# Altium PCB 24V_to_5V_Buck_Converter.PcbDoc
Units mm, origin at the board's own origin, x right, y up, seen from the top; angles counter-clockwise.
Board outline 41 x 20 mm, 2 copper layers (Top Layer, Bottom Layer); 14 components, 7 nets, 36 pads, 8 vias.
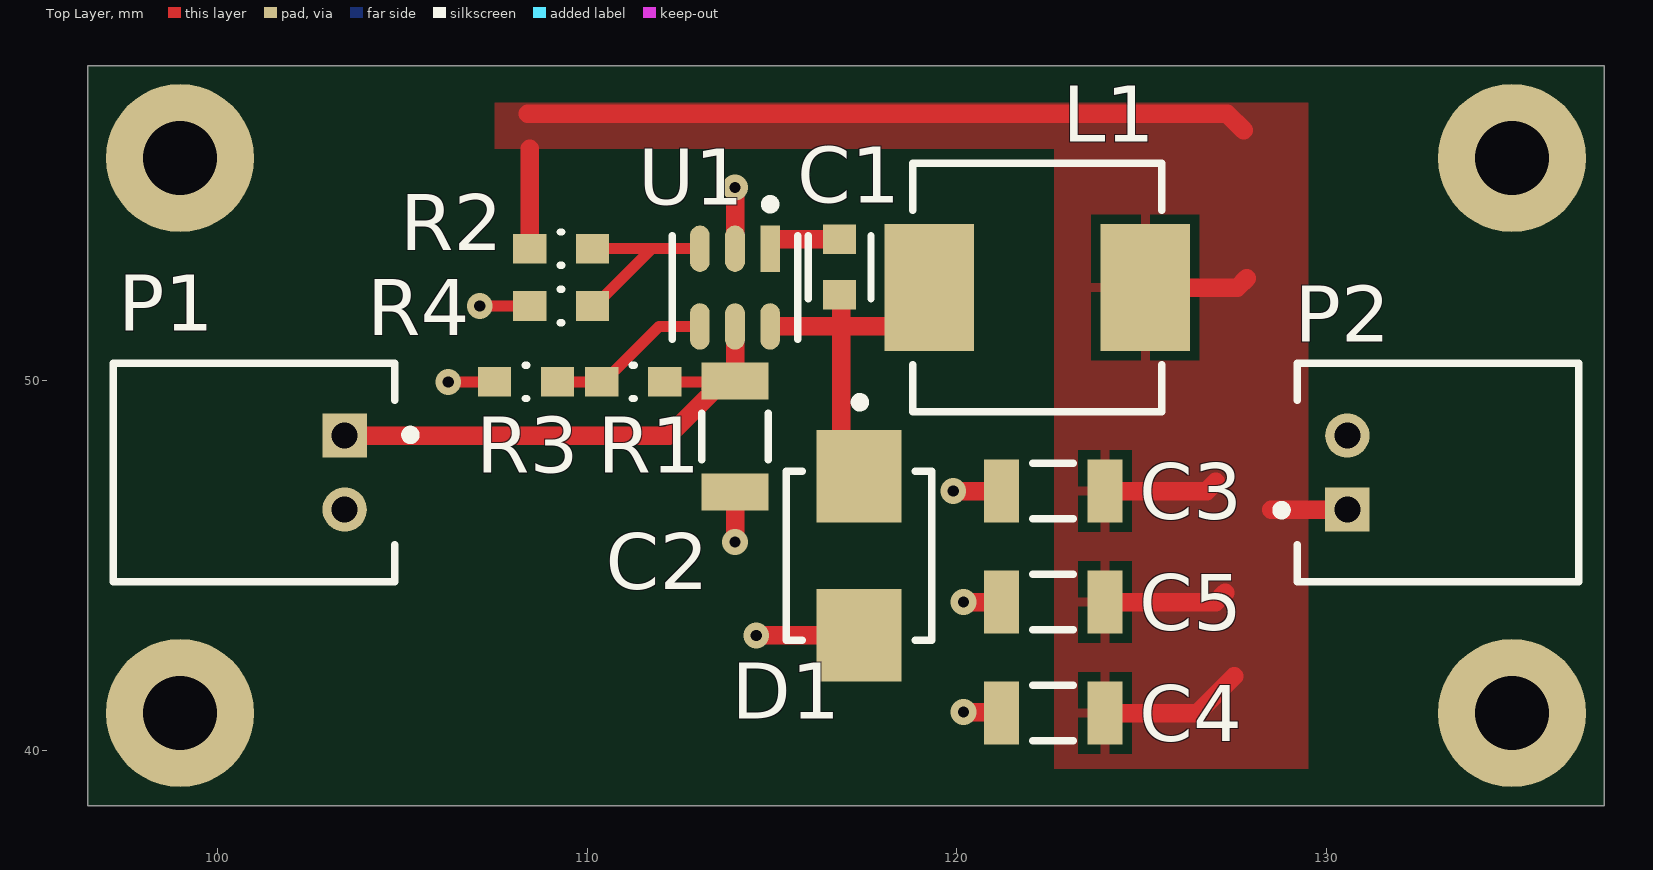
[diagram p0: Top Layer view]
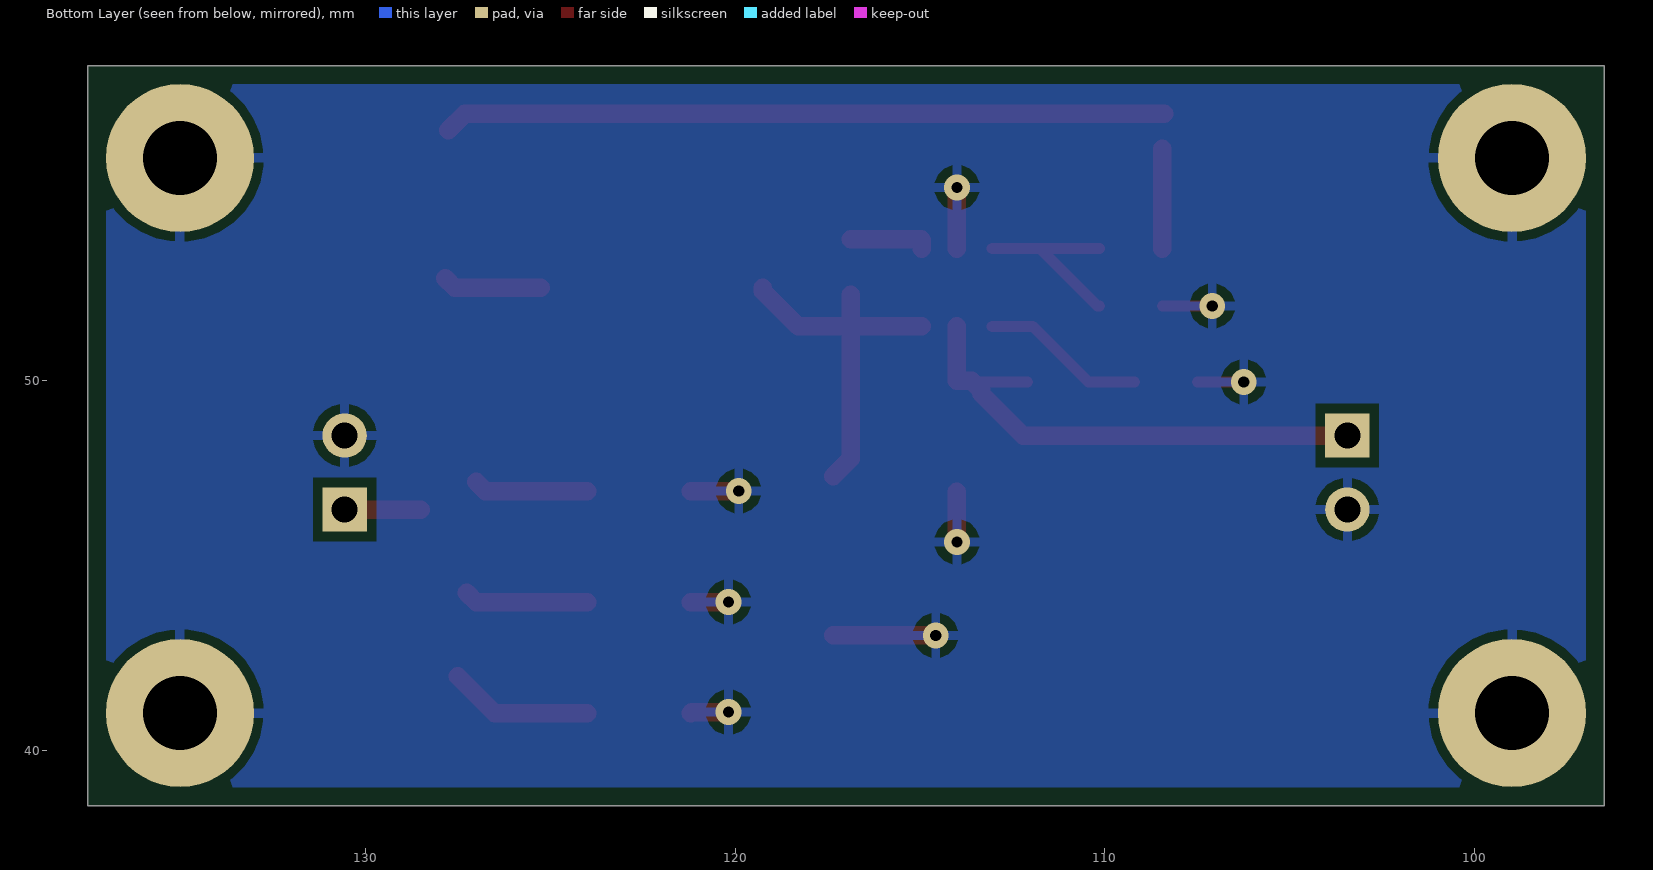
[diagram p1: Bottom Layer view, seen from below]
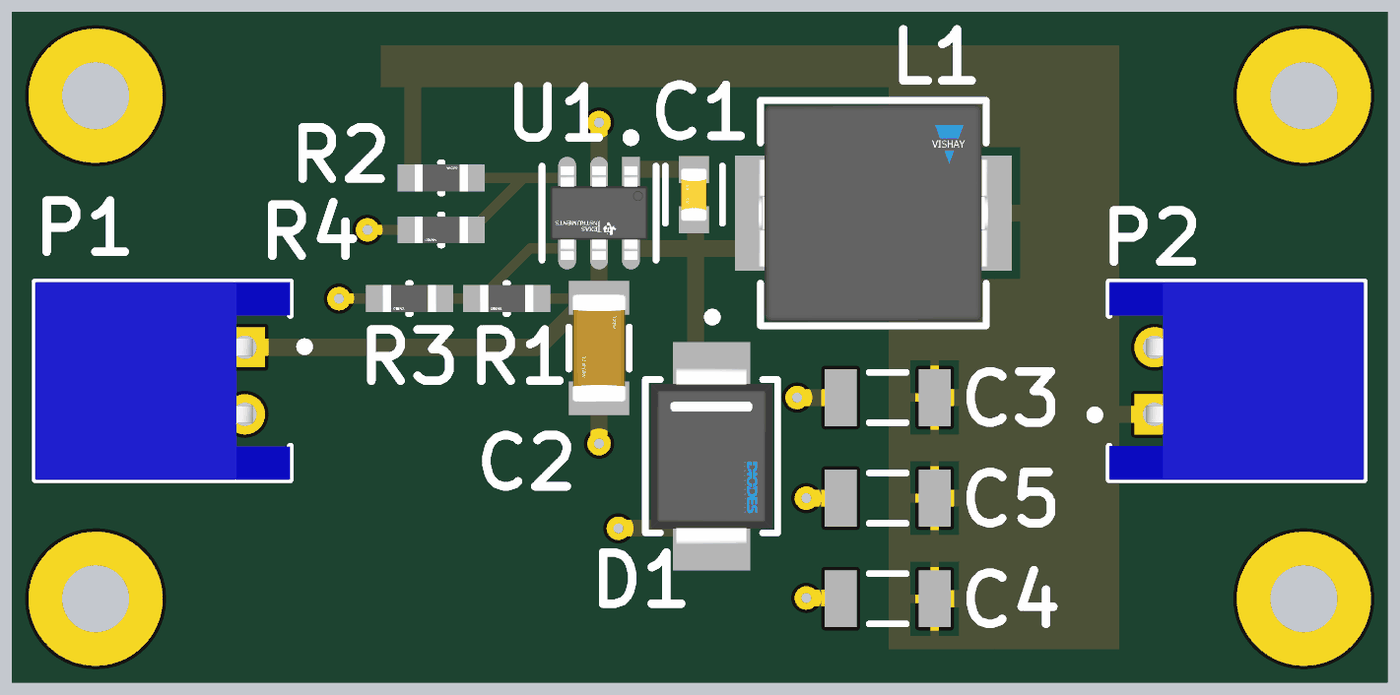
[diagram p2: 3D render of the assembled board from above, using the file's embedded part models]

## Layer stack, top to bottom
Top Solder: solder mask 0.0102, Solder Resist, Dk 3.5
Top Layer: signal copper 0.0356
Dielectric 1: dielectric 0.32, FR-4, Dk 4.8
Bottom Layer: signal copper 0.0356
Bottom Solder: solder mask 0.0102, Solder Resist, Dk 3.5

## Board outline
96.5,38.5 96.5,58.5 137.5,58.5 137.5,38.5

## Design rules (kind name [scope] priority, off if disabled: settings)
Clearance [All] p1: gap=0.254 ignorepadtopadclearanceinfootprint=FALSE
PolygonConnect [All] p1: connectstyle=Relief reliefconductorwidth=0.254 reliefentries=4 polygonreliefangle="90 Angle" airgapwidth=0.254
RoutingVias [All] p1: holewidth=0.711 width=1.27 viastyle="Through Hole" minholewidth=0.711 minwidth=1.27 maxholewidth=0.711 maxwidth=1.27
SolderMaskExpansion [All] p1: expansion=0.102 istentingtop=FALSE
SupplyNets "Schematic Supply Nets_2" [InNet('GND')] p1: voltage=0.000
SupplyNets "Schematic Supply Nets_1" [InNet('+24V')] p2: voltage=0.000
SupplyNets "Schematic Supply Nets" [InNet('+5')] p3: voltage=0.000
Width [All] p1: maxlimit=0.7 minlimit=0.2 preferedwidth=0.5
30 further rules are at their usual default settings.

## Components (designator, comment, footprint, x,y, rotation, side; value= is the part's Value field where it differs from the comment)
C1 "0.47uF" FP-CC0603-DA-MFG 116.825,53.05 r270 top value="470 nF"
C2 "4.7uF" FP-CC1206-1_25-MFG 114,48.475 r270 top value="4.7 uF"
C3 "22uF" CAPC1206(3216)190_L 122.6,47 r0 top
C4 "0.1uF" CAPC1206(3216)190_L 122.6,41 r0 top value=22uF
C5 ".01uF" CAPC1206(3216)190_L 122.6,44 r0 top value=22uF
D1 "B240-13-F" FP-SMB-MFG 117.35,45.25 r270 top value=200pF
L1 "22uH" FP-IHLP-2525CZ-FP_2_413x3-MFG 122.171,52.5 r0 top
P1 "JST 2-Pin Female" JST-S2B-PH-K-S_V 101,47.5 r270 top
P2 "JST 2-Pin Female" JST-S2B-PH-K-S_V 133,47.5 r90 top
R1 "86.6K" FP-RC0603-MFG 111.25,49.95 r180 top value=0Ω
R2 "55K" FP-RC0603-MFG 109.3,53.55 r0 top value=0Ω
R3 "10K" FP-RC0603-MFG 108.35,49.95 r180 top value=0Ω
R4 "10K" FP-RC0603-MFG 109.3,52 r180 top value=0Ω
U1 "LMR14010ADDCT" FP-DDC0006A-IPC_C 114,52.5 r270 top

## Footprints (in the part's own frame and the unit in brackets; to place one, negate y for a bottom-side part, rotate by r counter-clockwise, add the part's x,y. Pads: shape width x height; smd on the part's side, far side on the other; paste and mask are expansions set on the pad)
CAPC1206(3216)190_L [mm] "Chip Capacitor, Body 3.2x1.6mm, Height 1.9mm, IPC High Density"
  rect 0.95x1.7 smd: 1(-1.4,0) 2(1.4,0)
  silkscreen extent -0.55,-0.75 0.55,0.75, body extent -1.7,-0.9 1.7,0.9, height 1.9
FP-CC0603-DA-MFG [mm]
  rect 0.8x0.9 smd paste+0 mask+0: 1(-0.75,0) 2(0.75,0)
  silkscreen extent -0.85,-0.85 0.85,0.85, body extent -1.35,-0.75 1.35,0.75, height 0.25
FP-CC1206-1_25-MFG [mm]
  rect 1x1.8 smd paste+0 mask+0: 1(-1.5,0) 2(1.5,0)
  silkscreen extent -0.63,-0.9 0.63,0.9, body extent -2.2,-1.25 2.2,1.25, height 0.25
FP-DDC0006A-IPC_C [mm]
  rect 1.254x0.532 smd paste+0 mask+0: 1(-1.05,0.95)
  rrect100% 1.254x0.532 smd paste+0 mask+0: 2(-1.05,0) 3(-1.05,-0.95) 4(1.05,-0.95) 5(1.05,0) 6(1.05,0.95)
  silkscreen extent -2.37,-1.7 1.4,1.7, body extent -1.78,-1.55 1.78,1.55, height 0.25
FP-IHLP-2525CZ-FP_2_413x3-MFG [mil]
  rect 95x135 smd paste+0 mask+0: 1(-115,0) 2(115,0)
  silkscreen extent -132,-132 132,132, body extent -166,-136 166,136, height 10
FP-RC0603-MFG [mm]
  rect 0.9x0.8 smd paste+0 mask+0: 1(-0.85,0) 2(0.85,0)
  silkscreen extent -0.03,-0.45 0.03,0.45, body extent -1.4,-0.55 1.4,0.55, height 0.25
FP-SMB-MFG [mm]
  rect 2.5x2.3 smd paste+0 mask+0: 1(-2.15,0) 2(2.15,0)
  silkscreen extent -4.27,-1.97 2.28,1.97, body extent -3.5,-2.07 3.5,2.07, height 0.25
JST-S2B-PH-K-S_V [mm] "THD, 2-Leads, Body 7.6x5.9mm, Pitch 2mm"
  rect 1.2x1.2 hole 0.7: 1(-1,2.45)
  round 1.2 hole 0.7: 2(1,2.45)
  silkscreen extent -2.95,-3.8 2.95,4.35, body extent -2.95,-3.8 2.95,3.8, height 4.8

## Part data
C1: library part CMP-03422-000540-1, "CAP CER 0.47UF 16V X7R 0603", Capacitance="470 nF", Manufacturer=YAGEO, Manufacturer Part Number=CC0603KRX7R7BB474, Package=CC0603-DA, Temperature="-55°C to +125°C", Temperature Characteristic=X7R, Temperature Coefficient=15%, Temperature Range High=+125°C, Temperature Range Low=-55°C, Tolerance=0.1, Voltage="16 V", Automotive=No, Category=Cap, ComponentLink2Description=Datasheet, ComponentLink2URL=http://www.yageo.com/documents/recent/UPY-GPHC_X7R_6.3V-to-50V_18.pdf, Device Class L1="Passive Components", Device Class L2=Capacitors, Device Class L3="Ceramic Capacitors", Digikey Description="CAP CER 0.47UF 16V X7R 0603", Footprint Url=http://www.yageo.com/exep/pages/download/literatures/UPY-C_GEN_24.pdf, Height=0.9mm, Lead Free=Yes, Material=Ceramic, Mouser Description="Multilayer Ceramic Capacitors MLCC - SMD/SMT 470nF 16V X7R 10%", Octopart=https://octopart.com/cc0603krx7r7bb474-yageo-8376533, RoHS=TRUE, Voltage Rating="16 V"
C2: library part CMP-03422-000173-1, "CAP CER 4.7UF 50V X7R 1206", Capacitance="4.7 uF", Manufacturer=Yageo, Manufacturer Part Number=CC1206KKX7R9BB475, Package=CC1206-1.25, Temperature="-55°C to +125°C", Temperature Characteristic=X7R, Temperature Coefficient=15%, Temperature Range High=+125°C, Temperature Range Low=-55°C, Tolerance=0.1, Voltage Rating="50 V", Automotive=No, Automotive Grade=NA, Category=Cap, ComponentLink2Description=Datasheet, ComponentLink2URL=http://www.yageo.com/documents/recent/UPY-NP0X7R_HV_1KV-to-3KV_11.pdf, Device Class L1="Passive Components", Device Class L2=Capacitors, Device Class L3="Ceramic Capacitors", Digikey Description="CAP CER 4.7UF 50V X7R 1206", Footprint Url=http://www.yageo.com/exep/pages/download/literatures/UPY-C_GEN_24.pdf, Height=1.45mm, Lead Free=Yes, Material=Ceramic, Mouser Description="CC Series 1206 4.7 uF 50 V ±10% Tolerance X7R Multilayer Ceramic Capacitor", Octopart=https://octopart.com/cc1206kkx7r9bb475-yageo-50417574, RoHS=TRUE
C3 C4 C5: library part CMP-1037-04994-1, "CAP 22uF 16V -20% to +80% 1206 (3216 Metric) Thickness 1.9mm SMD", Case-EIA=1206, Case-Metric=3216, Rated Voltage="16 V", Tolerance="-20% to +80%", Max Thickness="1.9 mm", Technology=SMT
D1: library part CMP-12790-000044-1, "DIODE SCHOTTKY 40V 2A SMB", Capacitance=200pF, Forward Current=2A, Manufacturer="Diodes Inc.", Max Junction Temp=+150°C, Max Repetitive Reverse Voltage=40V, Max Surge Forward Current=50A, Package=SMB, Peak Reverse Current=0.5mA, Temperature="-65°C to +150°C", Temperature Range Low=-65°C, Automotive=No, Category=Diode, ComponentLink2Description=Datasheet, ComponentLink2URL=https://www.diodes.com/assets/Datasheets/ds13004.pdf, Device Class L1="Discrete Semiconductors", Device Class L2=Diodes, Device Class L3="Schottky Diodes", Digikey Description="DIODE SCHOTTKY 40V 2A SMB", Footprint Url=https://www.diodes.com/assets/Package-Files/SMB.pdf, Height=2.5mm, Lead Free=Yes, Manufacturer Part Number=B240-13-F, Mouser Description="Schottky Diodes & Rectifiers 40V 2A", Octopart=https://octopart.com/b240-13-f-diodes+inc.-325780, Reverse Voltage=40V, RoHS=TRUE, Standoff Height=0.05mm, Temperature Range High=+150°C
L1: library part CMP-2000-06442-2, "Commercial Inductors, Low DCR Series 22uH 2.9A 135mΩ 20%", Case Code (Imperial)=2525, Case Code (Metric)=6363, Current Rating=2.9A, DC Resistance (DCR)=135mR, Inductance Tolerance=20%, Max Operating Temperature=125°C, Min Operating Temperature=-55°C, Package Quantity=2000, Saturation Current=2.5A, Self Resonant Frequency=1MHz, Test Frequency=100kHz, Case/Package=2525, Contact Plating=Tin, Core Material=Ferrite, Depth=6.72mm, Height=3mm, Height - Seated (Max)=0.118inch, Inductance=22uH, Lead Free="Lead Free", Length=7.24mm, Max DC Current=2.9A, Military Standard=Not, Mount="Surface Mount", Number of Pins=2, Packaging="Tape and Reel", Radiation Hardening=No, RMS Current (Irms)=2.9A, Shielding=Shielded, Termination=SMD/SMT, Tolerance=20%, Width=0.255inch
P1 P2: library part CMP-1755-00004-1, "Male Header, Pitch 2 mm, 1 x 2 Position, Height 4.8 mm, Tail Length 3.4 mm, -25 to 85 degC, RoHS, Bulk", Capacitance="10 uF", Case\Package=Radial, Max Operating Temperature="85 degC", Min Operating Temperature="-40 degC", Package Quantity=200, Tolerance=20%, Voltage Rating="50 V", ComponentLink1Description=Datasheet, ComponentLink1URL=http://www.jst-mfg.com/product/pdf/eng/ePH.pdf, DatasheetVersion=Dec-12, Diameter="5 mm", Height="11 mm", Lead Pitch="2 mm", Length="11 mm", Mount="Through Hole", PackageDescription="Male Header, Pitch 2 mm, 1 x 2 Position, Height 4.8 mm, Tail Length 3.4 mm", PackageReference=S2B-PH-K-S, Packaging=Bulk, Pins=2, Radiation Hardening=No, REACH SVHC="No SVHC", RoHSCompliant=true, Voltage Rating (DC)="50 V"
R1 R2 R3 R4: library part CMP-2000-06925-2, "RES SMD 0 OHM JUMPER 1/10W 0603", Manufacturer=Yageo, Manufacturer Part Number=RC0603FR-070RL, Package=RC0603, Power Rating=0.1W, Resistance=0Ω, Temperature="-55°C to +155°C", Temperature Range High=+155°C, Temperature Range Low=-55°C, Tolerance=1%, Voltage Rating=75V, Automotive=No, Category=Res, ComponentLink2Description=Datasheet, ComponentLink2URL=http://www.yageo.com/documents/recent/PYu-RC_Group_51_RoHS_L_10.pdf, Composition="Thick Film", Device Class L1="Passive Components", Device Class L2=Resistors, Device Class L3="Chip SMD Resistors", Digikey Description="RES SMD 0 OHM JUMPER 1/10W 0603", Footprint Url=http://www.yageo.com/exep/pages/download/literatures/PYu-R_Mount_10.pdf, Height=0.55mm, Ipc Land Pattern Name=RESC16080X45, Lead Free=Yes, Mouser Description="RC Series 0603 0.1 W 0 O Jumper Surface Mount Thick Film Chip Resistor", Octopart=https://octopart.com/rc0603fr-070rl-yageo-1180803, RoHS=TRUE, Series=RC_L
U1: library part CMP-04918-000218-1, "IC REG BUCK ADJ 1A TSOT23-6", Case/Package=SOT-23-6, Max Input Voltage=40V, Max Operating Temperature=125°C, Min Input Voltage=4V, Min Operating Temperature=-40°C, Min Output Voltage=765mV, Output Current=1A, Switching Frequency=850kHz, Features=UVLO, Max Output Voltage=40V, Mount="Surface Mount", Number of Outputs=1, Output Configuration=Positive, Output Type=Adjustable, Packaging="Tape and Reel", RoHS Compliant=Yes, Synchronous Rectifier=No

## Free pads (board coordinates)
  round 4 hole 2: 2(135,56) 3(135,41) 4(99,56) 5(99,41)

## Via types
v1: diameter 0.7, hole 0.3, Top Layer to Bottom Layer, 8 vias

## Nets (pads, with @x,y where several pads share a name; then routed paths per layer and width w, separated by ;. In a path a pad name is that pad's centre, name@x,y a point inside that pad or via, vN(x,y) a via of type N, cw(c..) or ccw(c..) an arc to the next point about the centre after c; other vN are vias at no path point)
+5: C3.2 C4.2 C5.2 L1.2 P2.1 R2.1 | length 37.3
  Top Layer w0.5: 108.4,57.2 127.3,57.2 127.75,56.75 ; R2.1 108.45,56.25 ; C4.2 126.5,41 127.5,42 ; C5.2 127,44 127.25,44.25 ; C3.2 126.75,47 127,47.25 ; L1.2@125.25,52.5 127.579,52.5 127.829,52.75 ; 128.5,46.5 P2.1
+24V: C2.1 P1.1 R1.1 U1.5 | length 13.9
  Top Layer w0.3: R1.1 C2.1@113.35,49.95
  Top Layer w0.5: P1.1 112.213,48.5 113.35,49.637 113.35,49.725 113.6,49.975 C2.1 U1.5
GND: C2.2 C3.1 C4.1 C5.1 D1.2 P1.2 P2.2 pad.2 pad.3 pad.4 pad.5 R3.2 R4.2 U1.2 | length 11.8
  Top Layer w0.3: v1(106.25,49.95) R3.2 ; v1(107.1,52) R4.2
  Top Layer w0.5: v1(114,45.625) C2.2 ; U1.2 v1(114,55.2) v1@114,55.146 ; v1(114.575,43.1) D1.2 ; v1(119.9,47) C3.1 ; v1(120.175,41.025) 121.175,41.025 C4.1 ; v1(120.175,44) C5.1
NetC1_1: C1.1 U1.1 | length 2.2
  Top Layer w0.5: U1.1 114.95,53.784 114.966,53.8 C1.1@116.875,53.8
NetC1_2: C1.2 D1.1 L1.1 U1.6 | length 9.9
  Top Layer w0.5: U1.6 116.875,51.45 ; C1.2@116.875,52.3 116.875,51.45 ; D1.1 116.875,47.875 116.875,51.45 ; L1.1 119.25,52.406 118.293,51.45 116.875,51.45
NetR1_2: R1.2 R3.1 U1.4 | length 4.5
  Top Layer w0.3: R3.1 110.45,49.95 111.95,51.45 U1.4
NetR2_2: R2.2 R4.1 U1.3 | length 5.1
  Top Layer w0.3: R4.1 110.2,52 111.75,53.55 U1.3 ; R2.2 111.75,53.55

## Polygon pours and split planes (outlines as drawn)
GND on Bottom Layer "GND_L02_P000" (solid, pour order 0): 97,58 97,39 137,39 137,58
+5 on Top Layer "+5_L01_P006" (solid, pour order 6): 122.625,56.25 122.625,39.5 129.5,39.5 129.5,57.5 107.5,57.5 107.5,56.25

## Silkscreen, mask and mechanical layers (free items; w line width, h text height)
Mechanical 1:
  the board outline again, w0.254